# EAGLE board Jumper Board Horizontal V3.1 (EAGLE 9.6.2)
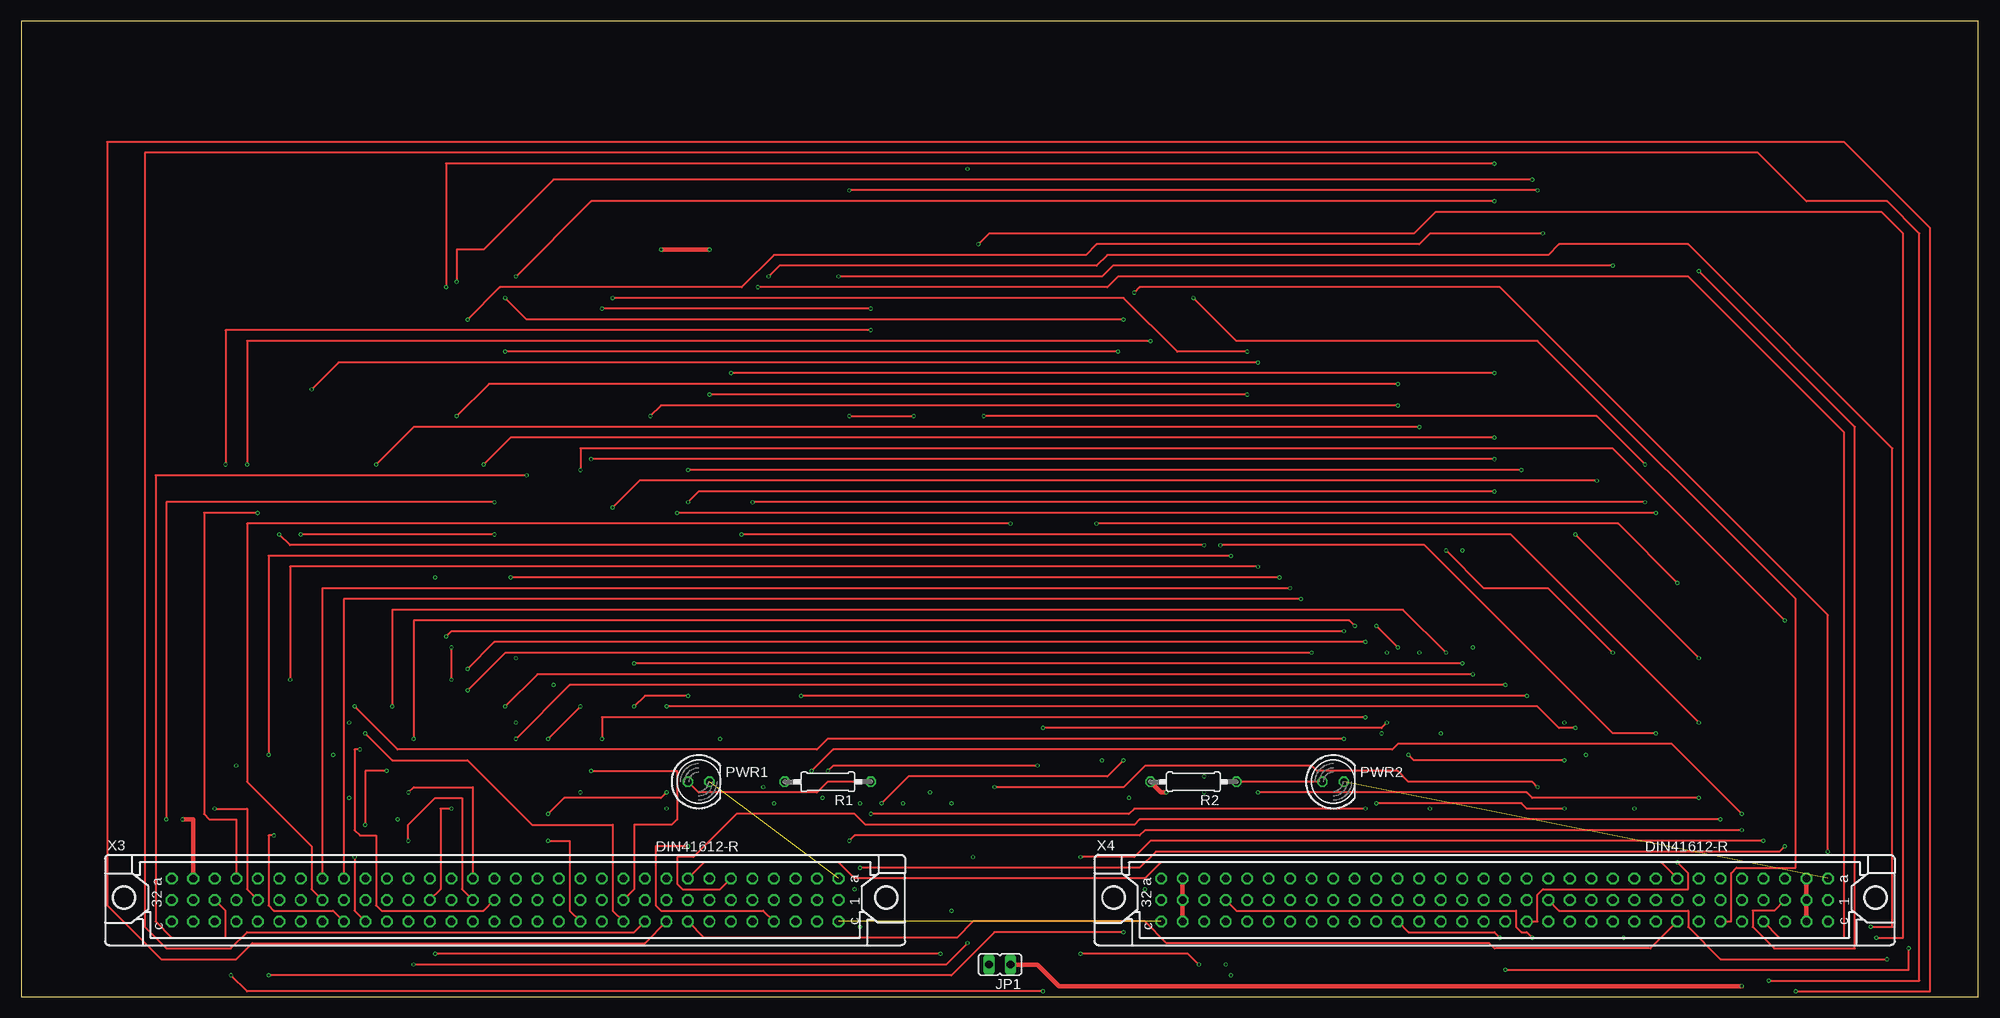
[diagram p0: board, top side]
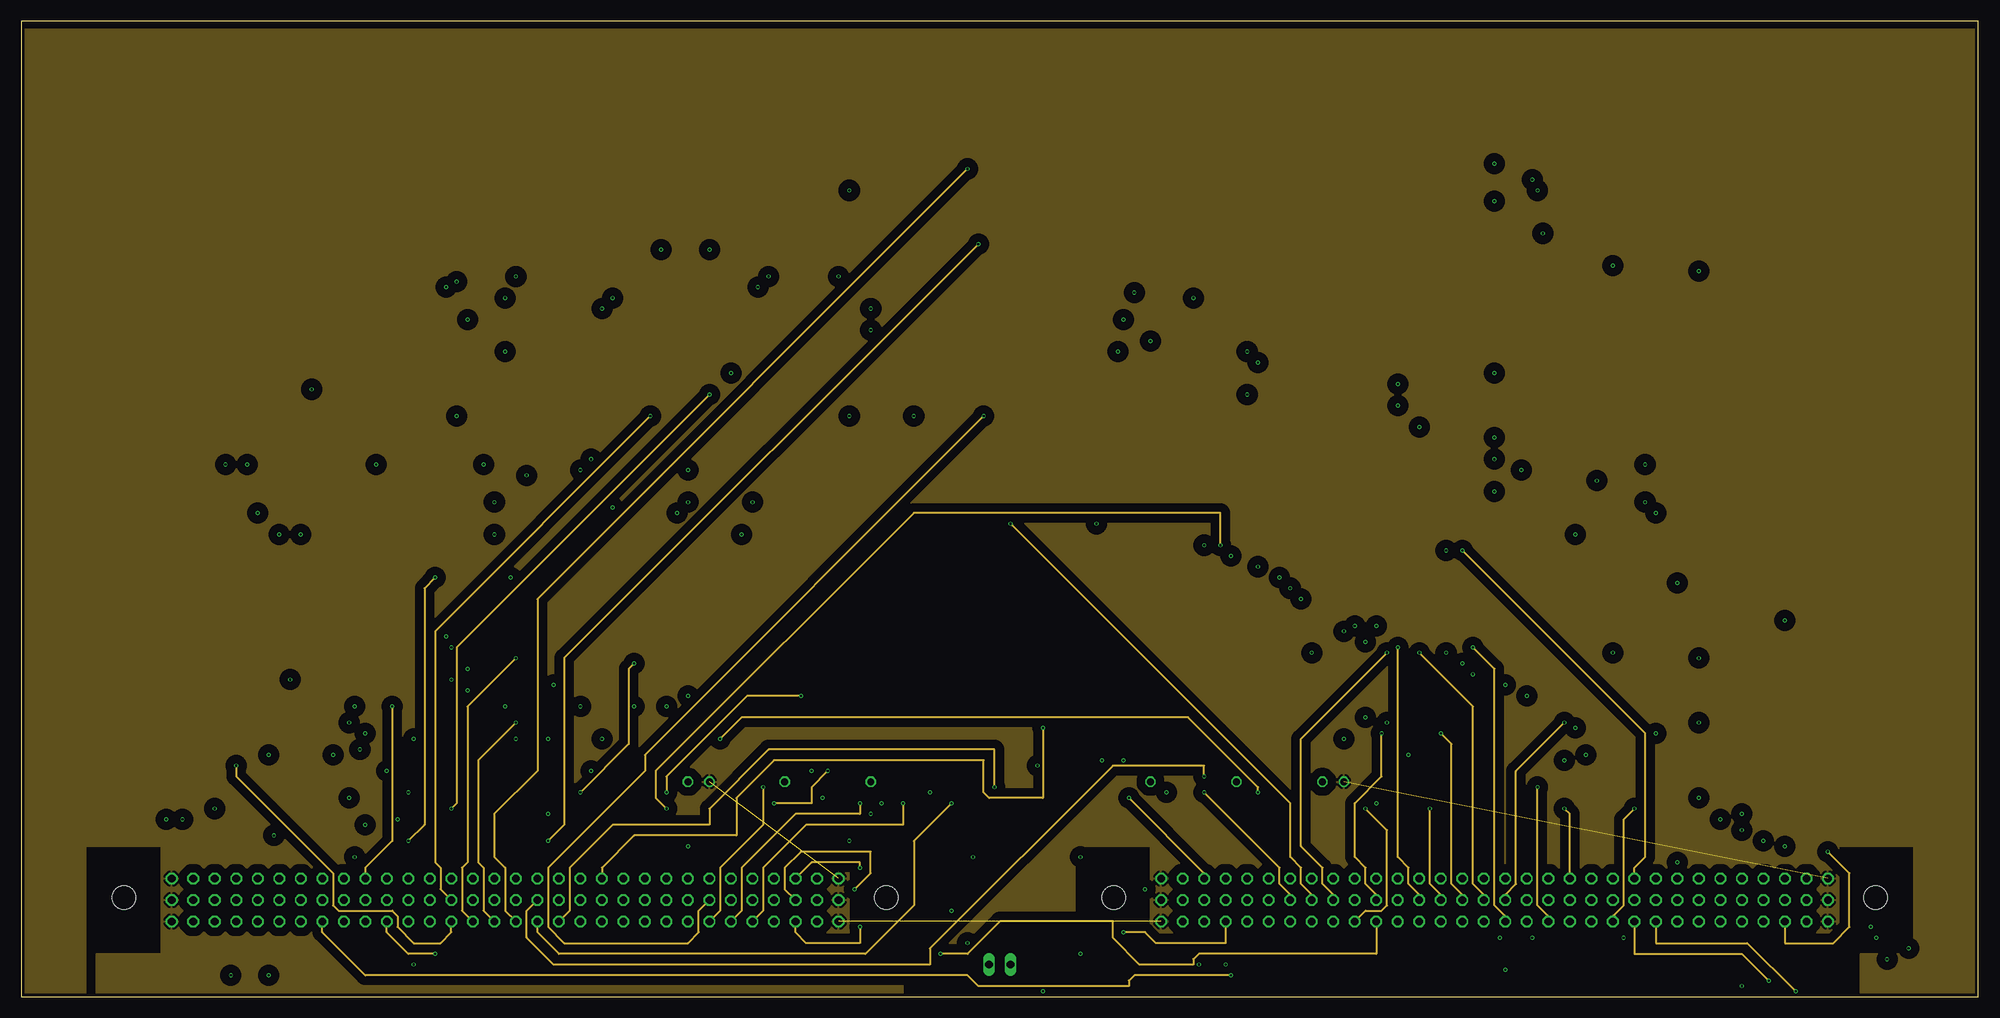
[diagram p1: board, inner layer Route2]
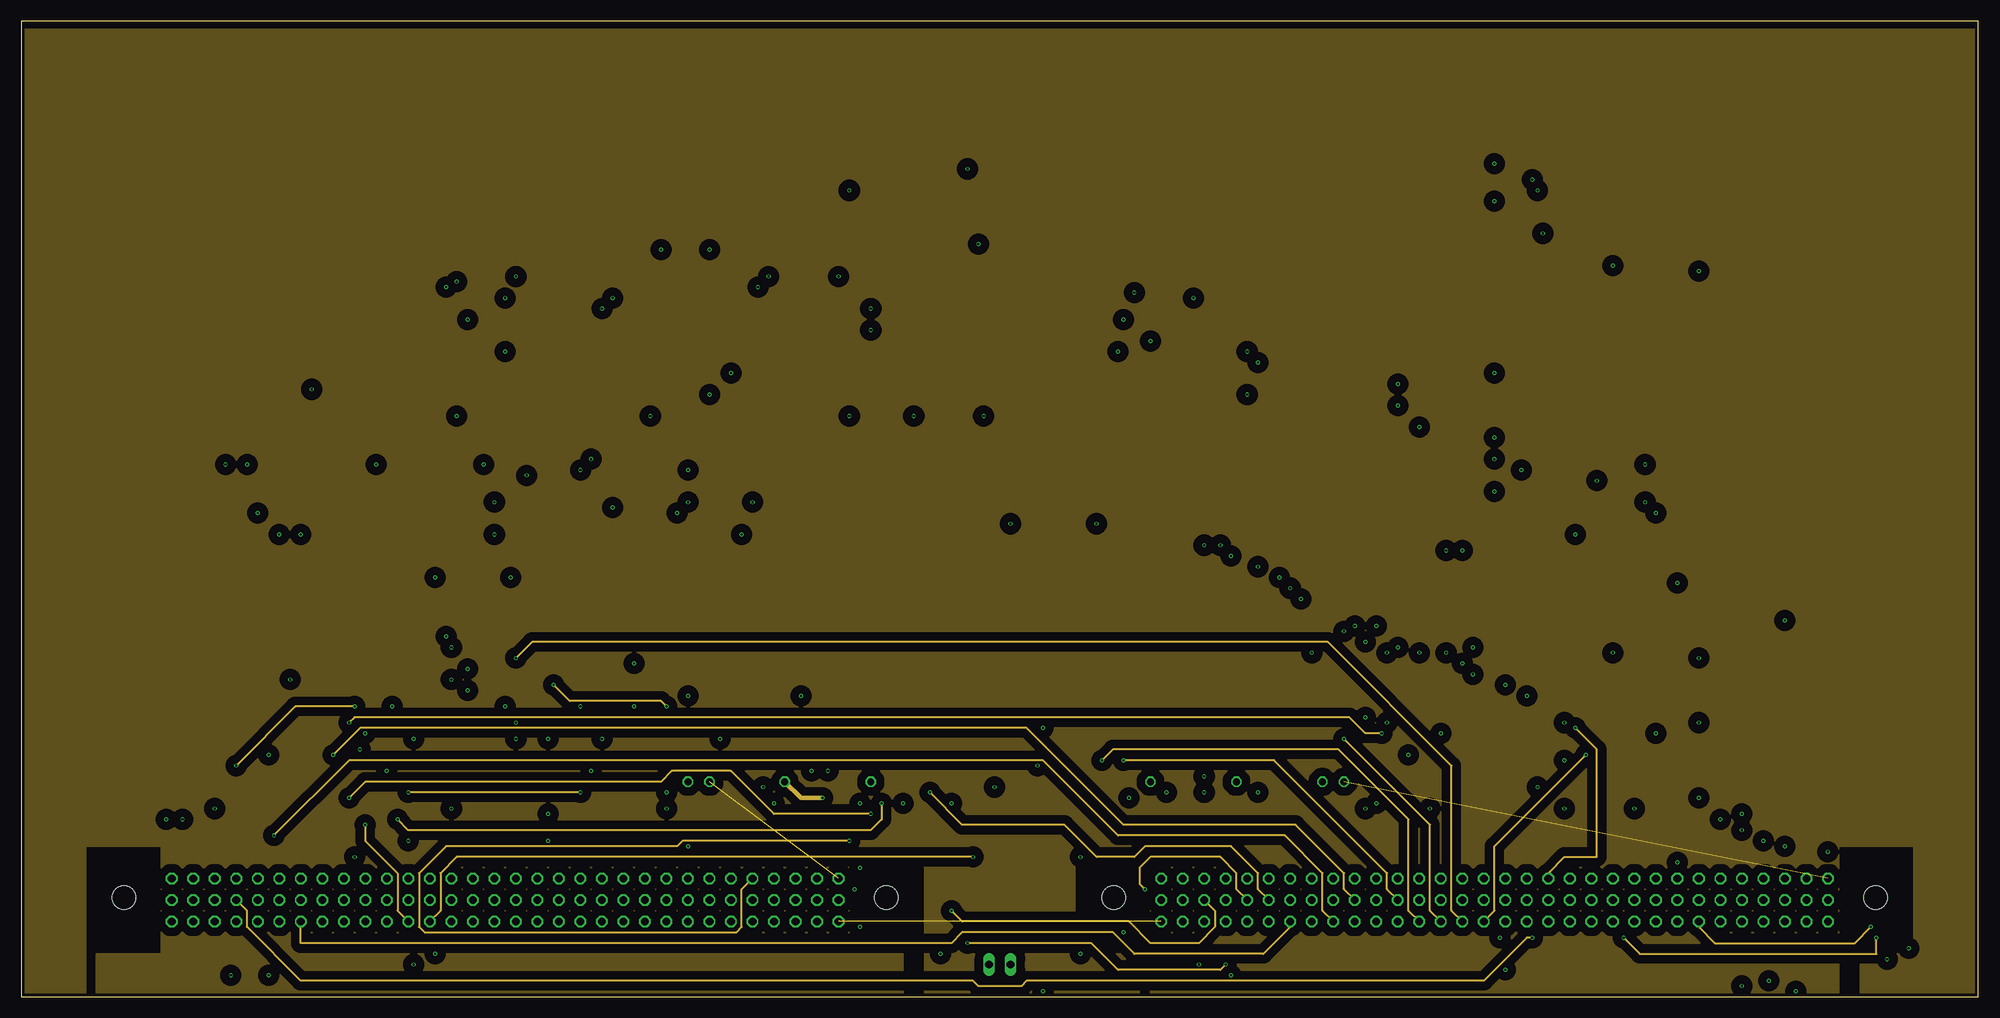
[diagram p2: board, inner layer Route15]
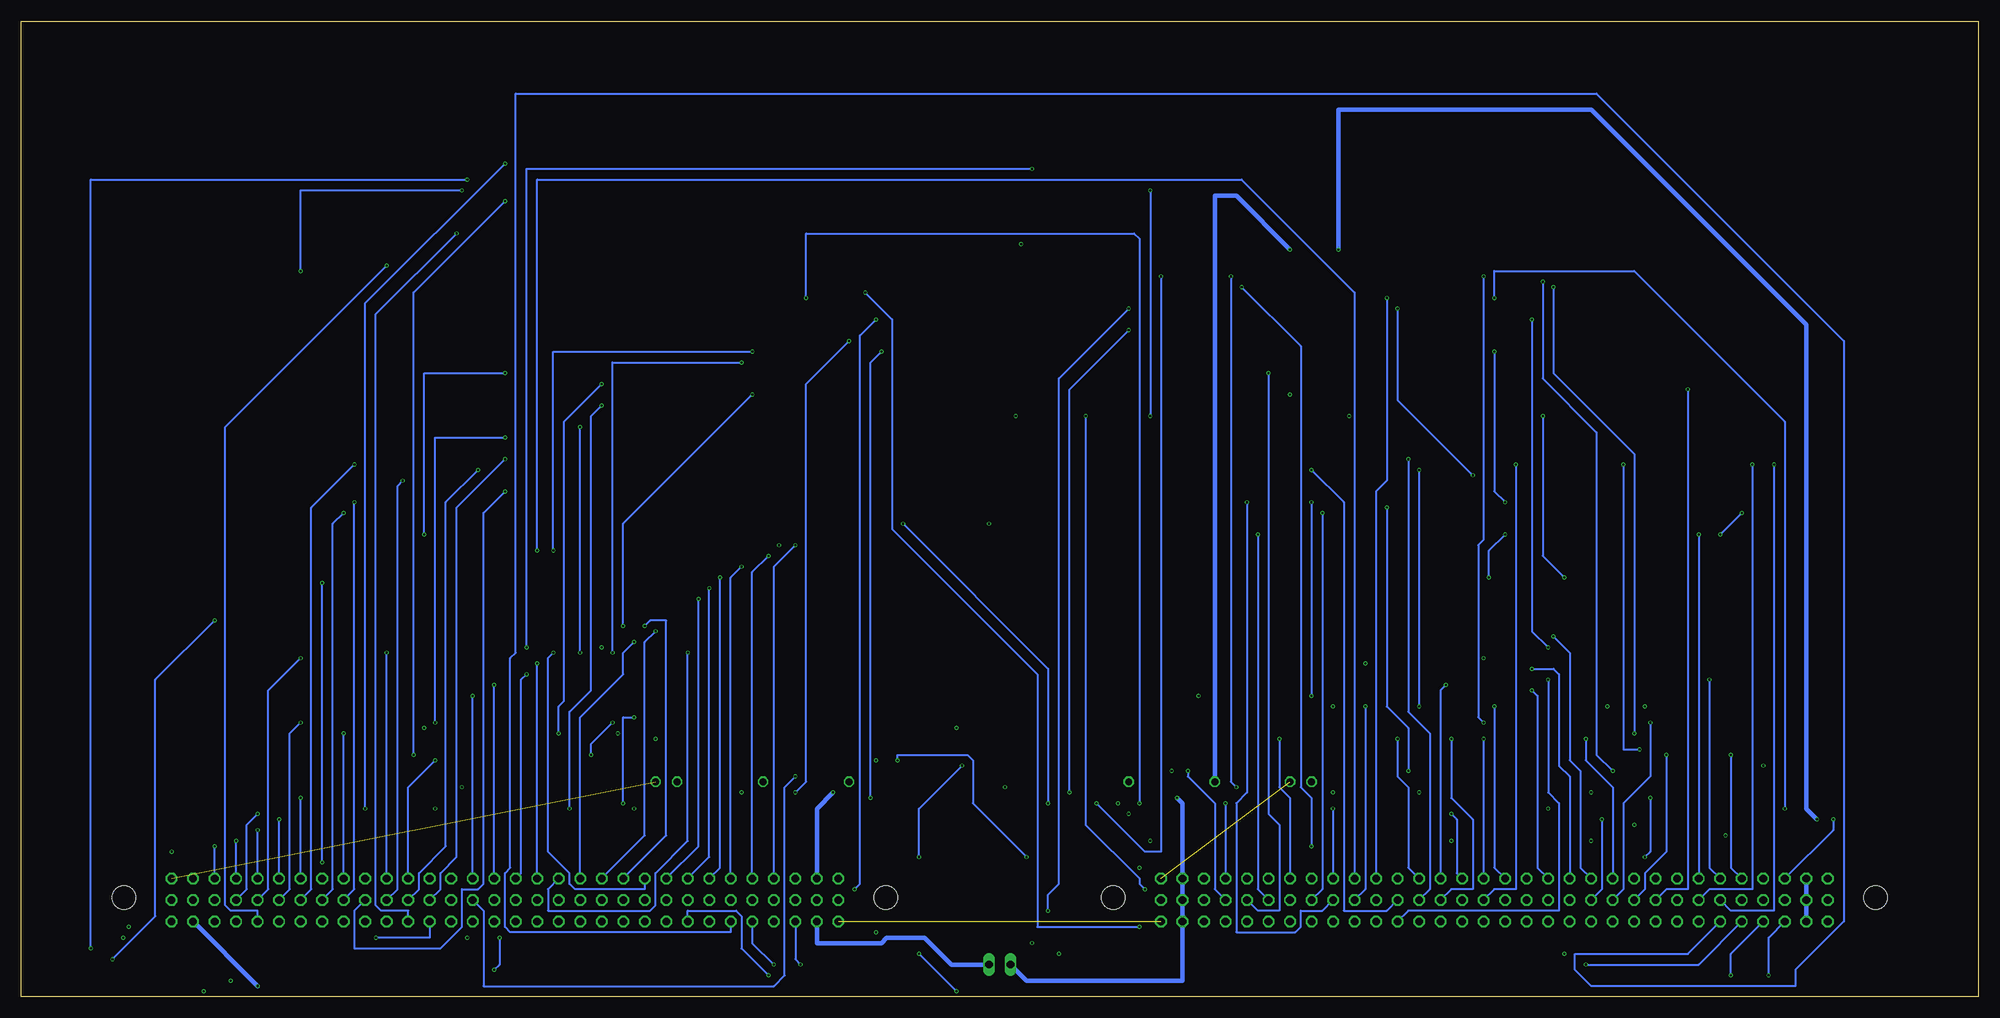
[diagram p3: board, bottom side, seen from below]

Size 231.12 x 115.24 mm. Coordinates in mm from the lower left corner, seen from the top.
Outline: 0,0 231.12,0 231.12,115.24 0,115.24 0,0
Copper layers (1*2*15*16): Top 0.035559375mm / dielectric 0.17018125mm / Route2 0.01778125mm / dielectric 47mil / Route15 0.01778125mm / dielectric 0.17018125mm / Bottom 0.035559375mm
Design rules "oshpark-4layer *": minimum track width 10mil, minimum drill 10mil, track to track 40mil, track to pad 10mil, pad to pad 10mil, via to via 10mil, smd to smd 5mil, copper to edge 15mil, drill to drill 6mil, minimum pad ring 4mil, minimum via ring 4mil, stop-mask expansion 2.5mil, vias tented up to drill 0mil, thermal gap 10mil
Net classes: 1 GND: width 0.508 mm, clearance 0.508 mm; 2 VCC1: width 0.508 mm, clearance 0.508 mm; 3 VCC2: width 0.508 mm, clearance 0.508 mm

## Footprints (pad centres in the part's own frame; a part is rotated, then mirrored left to right if it is on the bottom)
JP1 = drill 0.914 long: 1 0,-1.27; 2 0,1.27
LED5MM = drill 0.813 octagon: A -1.27,0; K 1.27,0
0207/10 = drill 0.813 octagon: 1 -5.08,0; 2 5.08,0
MABC96R = drill 0.914 octagon: A1 -2.54,39.37; A2 -2.54,36.83; A3 -2.54,34.29; A4 -2.54,31.75; A5 -2.54,29.21; A6 -2.54,26.67; A7 -2.54,24.13; A8 -2.54,21.59; A9 -2.54,19.05; A10 -2.54,16.51; A11 -2.54,13.97; A12 -2.54,11.43; A13 -2.54,8.89; A14 -2.54,6.35; A15 -2.54,3.81; A16 -2.54,1.27; A17 -2.54,-1.27; A18 -2.54,-3.81; A19 -2.54,-6.35; A20 -2.54,-8.89; A21 -2.54,-11.43; A22 -2.54,-13.97; A23 -2.54,-16.51; A24 -2.54,-19.05; A25 -2.54,-21.59; A26 -2.54,-24.13; A27 -2.54,-26.67; A28 -2.54,-29.21; A29 -2.54,-31.75; A30 -2.54,-34.29; A31 -2.54,-36.83; A32 -2.54,-39.37; B1 0,39.37; B2 0,36.83; B3 0,34.29; B4 0,31.75; B5 0,29.21; B6 0,26.67; B7 0,24.13; B8 0,21.59; B9 0,19.05; B10 0,16.51; B11 0,13.97; B12 0,11.43; B13 0,8.89; B14 0,6.35; B15 0,3.81; B16 0,1.27; B17 0,-1.27; B18 0,-3.81; B19 0,-6.35; B20 0,-8.89; B21 0,-11.43; B22 0,-13.97; B23 0,-16.51; B24 0,-19.05; B25 0,-21.59; B26 0,-24.13; B27 0,-26.67; B28 0,-29.21; B29 0,-31.75; B30 0,-34.29; B31 0,-36.83; B32 0,-39.37; C1 2.54,39.37; C2 2.54,36.83; C3 2.54,34.29; C4 2.54,31.75; C5 2.54,29.21; C6 2.54,26.67; C7 2.54,24.13; C8 2.54,21.59; C9 2.54,19.05; C10 2.54,16.51; C11 2.54,13.97; C12 2.54,11.43; C13 2.54,8.89; C14 2.54,6.35; C15 2.54,3.81; C16 2.54,1.27; C17 2.54,-1.27; C18 2.54,-3.81; C19 2.54,-6.35; C20 2.54,-8.89; C21 2.54,-11.43; C22 2.54,-13.97; C23 2.54,-16.51; C24 2.54,-19.05; C25 2.54,-21.59; C26 2.54,-24.13; C27 2.54,-26.67; C28 2.54,-29.21; C29 2.54,-31.75; C30 2.54,-34.29; C31 2.54,-36.83; C32 2.54,-39.37 | hole 2.794: -0.305,45; -0.305,-45

## Placement (x,y rotation side)
JP1  [JP1]  115.57,3.81 90 top
PWR1  [LED5MM]  80.01,25.4 0 top
PWR2  [LED5MM]  154.94,25.4 0 top
R1  330  [0207/10]  95.25,25.4 180 top
R2  330  [0207/10]  138.43,25.4 180 top
X3  MABC96R  [MABC96R]  57.15,11.43 270 top
X4  MABC96R  [MABC96R]  173.99,11.43 270 top

## Library data of the parts
JP1 = jumper
PWR1 PWR2 = led
R1 R2 = eagle-ltspice; SPICEMODEL: NONE; SPICEPREFIX: R
X3 X4 = con-vg

## Nets
GND [GND]: PWR1.K PWR2.K X3.A1 X3.A32 X3.B1 X3.B32 X3.C1 X3.C32 X4.A1 X4.A32 X4.B1 X4.B32 X4.C1 X4.C32
N$4: X3.A3 X4.A3
N$6: X3.A4 X4.A4
N$7: X3.A5 X4.A5
N$8: X3.A6 X4.A6
N$9: X3.A7 X4.A7
N$10: X3.A8 X4.A8
N$11: X3.A9 X4.A9
N$12: X3.A10 X4.A10
N$13: X3.A11 X4.A11
N$14: X3.A12 X4.A12
N$15: X3.A13 X4.A13
N$16: X3.A14 X4.A14
N$17: X3.A15 X4.A15
N$18: X3.A16 X4.A16
N$19: X3.A17 X4.A17
N$20: X3.A18 X4.A18
N$21: X3.A19 X4.A19
N$22: X3.A20 X4.A20
N$23: X3.A21 X4.A21
N$24: X3.A22 X4.A22
N$25: X3.A23 X4.A23
N$26: X3.A24 X4.A24
N$27: X3.A25 X4.A25
N$28: X3.A26 X4.A26
N$29: X3.A27 X4.A27
N$30: X3.A28 X4.A28
N$31: X3.A29 X4.A29
N$32: X3.A30 X4.A30
N$35: PWR1.A R1.1
N$36: PWR2.A R2.1
N$37: X3.B3 X4.B3
N$38: X3.B4 X4.B4
N$39: X3.B5 X4.B5
N$40: X3.B6 X4.B6
N$41: X3.B7 X4.B7
N$42: X3.B8 X4.B8
N$43: X3.B9 X4.B9
N$44: X3.B10 X4.B10
N$45: X3.B11 X4.B11
N$46: X3.B12 X4.B12
N$47: X3.B13 X4.B13
N$48: X3.B14 X4.B14
N$49: X3.B15 X4.B15
N$50: X3.B16 X4.B16
N$51: X3.B17 X4.B17
N$52: X3.B18 X4.B18
N$53: X3.B19 X4.B19
N$54: X3.B20 X4.B20
N$55: X3.B21 X4.B21
N$56: X3.B22 X4.B22
N$57: X3.B23 X4.B23
N$58: X3.B24 X4.B24
N$59: X3.B25 X4.B25
N$60: X3.B26 X4.B26
N$61: X3.B27 X4.B27
N$62: X3.B28 X4.B28
N$63: X3.B29 X4.B29
N$64: X3.B30 X4.B30
N$69: X3.C3 X4.C3
N$70: X3.C4 X4.C4
N$71: X3.C5 X4.C5
N$72: X3.C6 X4.C6
N$73: X3.C7 X4.C7
N$74: X3.C8 X4.C8
N$75: X3.C9 X4.C9
N$76: X3.C10 X4.C10
N$77: X3.C11 X4.C11
N$78: X3.C12 X4.C12
N$79: X3.C13 X4.C13
N$80: X3.C14 X4.C14
N$81: X3.C15 X4.C15
N$82: X3.C16 X4.C16
N$83: X3.C17 X4.C17
N$84: X3.C18 X4.C18
N$85: X3.C19 X4.C19
N$86: X3.C20 X4.C20
N$87: X3.C21 X4.C21
N$88: X3.C22 X4.C22
N$89: X3.C23 X4.C23
N$90: X3.C24 X4.C24
N$91: X3.C25 X4.C25
N$92: X3.C26 X4.C26
N$93: X3.C27 X4.C27
N$94: X3.C28 X4.C28
N$95: X3.C29 X4.C29
N$96: X3.C30 X4.C30
V1 [VCC2]: JP1.2 R1.2 X3.A2 X3.A31 X3.B2 X3.B31 X3.C2 X3.C31
V2 [VCC1]: JP1.1 R2.2 X4.A2 X4.A31 X4.B2 X4.B31 X4.C2 X4.C31

## Tracks (layer width: path | path; a pad name or v marks a point on that pad's centre or on a via)
GND  (3 unrouted)
  pour Route2: 104.14,0 8.89,0 8.89,5.08 16.51,5.08 16.51,17.78 7.62,17.78 7.62,0 0,0 0,114.3 231.14,114.3 231.14,0 217.17,0 217.17,5.08 223.52,5.08 223.52,17.78 214.63,17.78 214.63,0 133.35,0 133.35,17.78 124.46,17.78 124.46,5.08 132.08,5.08 132.08,0 106.68,0 106.68,17.78 97.79,17.78 97.79,5.08 104.14,5.08
N$4  (via drill 0.25)
  Top 0.254: v99.06,15.24 132.08,15.24 133.99,17.14 207.65,17.14 v208.28,17.78
  Route2 0.254: X3.A3 93.34,15.88 99.06,15.88 v99.06,15.24
  Bottom 0.254: X4.A3 v208.28,17.78
N$6  (via drill 0.25)
  Top 0.254: v95.25,26.67 95.89,27.3 v120.02,27.3 | v125.09,16.51 131.44,16.51 133.35,18.41 v205.74,18.41
  Route2 0.254: v88.9,22.86 93.34,22.86 93.34,24.77 v95.25,26.67
  Bottom 0.254: v88.9,22.86 X3.A4 | v120.02,27.3 125.09,22.23 v125.09,16.51 | X4.A4 v205.74,18.41
N$7  (via drill 0.25)
  Top 0.254: v97.79,18.41 98.42,19.05 132.08,19.05 132.72,19.68 v203.2,19.68
  Route15 0.254: X3.A5 85.09,12.7 85.09,8.26 84.45,7.62 47.62,7.62 46.99,8.26 46.99,14.61 50.16,17.78 77.47,17.78 78.11,18.41 v97.79,18.41
  Bottom 0.254: X4.A5 v203.2,19.68
N$8  (via drill 0.25)
  Top 0.254: X3.A6 82.55,12.7 78.11,12.7 77.47,13.34 77.47,16.51 79.38,16.51 84.45,21.59 98.42,21.59 99.69,20.32 131.44,20.32 132.08,20.95 v200.66,20.95
  Bottom 0.254: X4.A6 v200.66,20.95
N$9  (via drill 0.25)
  Top 0.254: v146.05,24.13 177.8,24.13 178.44,23.5 v198.12,23.5
  Route2 0.254: v82.55,30.48 85.09,33.02 137.79,33.02 146.05,24.77 v146.05,24.13
  Bottom 0.254: X3.A7 81.28,23.5 82.55,24.77 v82.55,30.48 | X4.A7 v198.12,23.5
N$10
  Top 0.254: X3.A8 80.64,15.88 96.52,15.88 98.42,13.97 132.72,13.97 134.62,15.88 193.68,15.88 X4.A8
N$11  (via drill 0.25)
  Top 0.254: v141.6,53.34 165.74,53.34 187.96,31.11 v193.04,31.11
  Route2 0.254: v76.2,22.23 74.93,23.5 74.93,26.67 105.41,57.15 141.6,57.15 v141.6,53.34
  Bottom 0.254: v76.2,22.23 X3.A9 | X4.A9 v193.04,31.11
N$12  (via drill 0.25)
  Route2 0.254: v170.18,52.7 191.77,31.11 191.77,16.51 190.5,15.24 X4.A10
  Bottom 0.254: X3.A10 73.66,83.19 87,96.52 170.18,96.52 v170.18,52.7
N$13  (via drill 0.25)
  Top 0.254: v69.85,82.55 130.18,82.55 136.53,76.2 v144.78,76.2 | v168.28,52.7 172.72,48.26 180.34,48.26 v187.96,40.64
  Bottom 0.254: X3.A11 71.12,59.69 69.85,60.96 v69.85,82.55 | v144.78,76.2 168.28,76.2 v168.28,52.7 | X4.A11 v187.96,40.64
N$14  (via drill 0.25)
  Top 0.254: v120.65,31.75 160.66,31.75 v161.29,32.38 | v163.83,28.57 164.47,27.94 v182.25,27.94
  Route2 0.254: X3.A12 68.58,15.24 72.39,19.05 84.45,19.05 84.45,23.5 88.9,27.94 113.67,27.94 113.67,24.13 114.3,23.5 120.65,23.5 v120.65,31.75
  Bottom 0.254: v161.29,32.38 163.83,29.84 v163.83,28.57 | v182.25,27.94 185.42,24.77 X4.A12
N$15  (via drill 0.25)
  Top 0.254: v68.58,30.48 68.58,33.02 v158.75,33.02 | v160.02,22.86 177.16,22.86 177.8,22.23 v182.25,22.23
  Route2 0.254: v182.25,22.23 182.88,21.59 X4.A13
  Bottom 0.254: X3.A13 67.31,15.24 67.31,24.77 68.58,26.04 v68.58,30.48 | v158.75,33.02 160.02,33.02 v160.02,22.86
N$16  (via drill 0.25)
  Top 0.254: v76.2,34.29 179.07,34.29 181.61,31.75 v183.51,31.75
  Route15 0.254: v62.87,36.83 64.77,34.92 75.56,34.92 v76.2,34.29 | v183.51,31.75 186.06,29.21 186.06,16.51 182.25,16.51 180.34,14.61 X4.A14
  Bottom 0.254: X3.A14 63.5,36.2 v62.87,36.83
N$17  (via drill 0.25)
  Top 0.254: v62.23,21.59 64.14,23.5 75.56,23.5 v76.2,24.13 | v177.8,35.56 v92.08,35.56
  Route2 0.254: v76.2,24.13 76.2,26.04 85.72,35.56 v92.08,35.56
  Bottom 0.254: X3.A15 61.59,14.61 61.59,20.95 v62.23,21.59 | X4.A15 v177.8,35.56
N$18  (via drill 0.25)
  Top 0.254: v58.42,30.48 64.77,36.83 v175.26,36.83
  Bottom 0.254: v58.42,30.48 X3.A16 | X4.A16 v175.26,36.83
N$19  (via drill 0.25)
  Top 0.254: v57.15,34.29 60.96,38.1 v171.45,38.1
  Bottom 0.254: X3.A17 57.15,15.24 v57.15,34.29 | v171.45,38.1 172.09,37.47 172.09,14.61 X4.A17
N$20  (via drill 0.25)
  Top 0.254: X3.A18 53.34,24.77 46.35,24.77 v45.72,24.13 | v170.18,39.37 v72.39,39.37
  Route2 0.254: v66.04,24.13 71.75,29.84 71.75,38.73 v72.39,39.37
  Route15 0.254: v66.04,24.13 v45.72,24.13
  Bottom 0.254: X4.A18 v170.18,39.37
N$21  (via drill 0.25)
  Top 0.254: v52.7,36.2 57.15,40.64 v152.4,40.64
  Bottom 0.254: X3.A19 52.07,15.24 52.07,35.56 v52.7,36.2 | v152.4,40.64 152.4,18.41 156.21,14.61 156.21,10.79 156.84,10.16 168.91,10.16 168.91,12.7 X4.A19
N$22  (via drill 0.25)
  Top 0.254: v52.7,38.73 55.88,41.91 v158.75,41.91
  Bottom 0.254: X3.A20 48.26,26.04 49.53,27.3 49.53,38.1 50.16,38.73 v52.7,38.73 | v158.75,41.91 160.02,40.64 160.02,38.1 165.1,33.02 X4.A20
N$23  (via drill 0.25)
  Top 0.254: v50.16,42.55 50.8,43.18 v156.21,43.18
  Bottom 0.254: X3.A21 46.99,15.24 46.99,26.67 48.26,27.94 48.26,40.64 v50.16,42.55 | v156.21,43.18 157.48,41.91 157.48,19.05 X4.A21
N$24  (via drill 0.25)
  Top 0.254: v46.35,30.48 46.35,44.45 156.84,44.45 v157.48,43.81
  Bottom 0.254: X3.A22 43.18,24.77 46.35,27.94 v46.35,30.48 | v157.48,43.81 156.84,44.45 154.94,44.45 154.94,19.05 X4.A22
N$25  (via drill 0.25)
  Top 0.254: v43.81,34.29 43.81,45.72 163.19,45.72 v168.28,40.64
  Route2 0.254: X3.A23 40.64,15.24 43.81,18.41 v43.81,34.29
  Bottom 0.254: v168.28,40.64 168.91,40.01 168.91,17.14 166.37,14.61 166.37,13.34 165.74,12.7 157.48,12.7 X4.A23
N$26  (via drill 0.25)
  Top 0.254: X3.A24 38.1,46.99 v151.13,46.99
  Bottom 0.254: v151.13,46.99 151.13,17.78 X4.A24
N$27  (via drill 0.25)
  Top 0.254: X3.A25 35.56,48.26 v149.86,48.26
  Bottom 0.254: v149.86,48.26 149.86,16.51 X4.A25
N$28  (via drill 0.25)
  Top 0.254: v55.88,54.61 v33.02,54.61 | v148.59,49.53 v57.78,49.53
  Bottom 0.254: v33.02,54.61 X3.A26 | v55.88,54.61 57.78,52.7 v57.78,49.53 | v148.59,49.53 148.59,15.24 X4.A26
N$29  (via drill 0.25)
  Top 0.254: v31.75,37.47 31.75,50.8 v146.05,50.8
  Bottom 0.254: X3.A27 31.75,15.24 v31.75,37.47 | v146.05,50.8 147.32,49.53 X4.A27
N$30  (via drill 0.25)
  Top 0.254: v29.21,28.57 29.21,52.07 v142.88,52.07
  Bottom 0.254: X3.A28 29.21,15.24 v29.21,28.57 | v142.88,52.07 144.78,50.16 X4.A28
N$31  (via drill 0.25)
  Top 0.254: X3.A29 25.4,20.95 22.23,20.95 21.59,21.59 21.59,57.15 v27.94,57.15 | v30.48,54.61 31.75,53.34 v139.7,53.34
  Bottom 0.254: v30.48,54.61 v27.94,57.15 | v139.7,53.34 142.24,50.8 X4.A29
N$32  (via drill 0.25)
  Top 0.254: v17.14,20.95 17.14,58.42 v55.88,58.42 | v129.54,76.2 v57.15,76.2
  Route2 0.254: v130.81,23.5 139.7,14.61 X4.A30
  Bottom 0.254: X3.A30 17.14,19.68 v17.14,20.95 | v55.88,58.42 57.15,59.69 v57.15,76.2 | v129.54,76.2 130.81,74.93 v130.81,23.5
N$35
  Top 0.254: PWR1.A 80.01,24.13 93.98,24.13 95.25,25.4 R1.1
N$36
  Top 0.254: PWR2.A R2.1
N$37  (via drill 0.25)
  Top 0.254: v97.79,68.58 v105.41,68.58 | v179.07,95.25 v97.79,95.25 | v198.12,85.72 216.53,67.31 216.53,5.71 207.01,5.71 204.47,8.26 204.47,10.16 207.01,10.16 X4.B3
  Route2 0.254: X3.B3 90.17,12.7 90.17,15.24 92.08,17.14 100.33,17.14 100.33,14.61 v98.42,12.7
  Bottom 0.254: v98.42,12.7 99.06,13.34 99.06,13.97 105.41,20.32 v105.41,68.58 | v97.79,95.25 v97.79,68.58 | v179.07,95.25 198.12,95.25 v198.12,85.72
N$38  (via drill 0.25)
  Top 0.254: v93.34,26.67 95.89,29.21 161.93,29.21 162.56,29.84 194.94,29.84 v203.2,21.59
  Bottom 0.254: X3.B4 90.17,12.7 90.17,22.86 93.34,26.04 v93.34,26.67 | v203.2,21.59 204.47,20.32 204.47,12.7 X4.B4
N$39  (via drill 0.25)
  Top 0.254: v173.99,73.66 v83.82,73.66 | v198.12,40.01 v183.51,54.61
  Bottom 0.254: X3.B5 85.09,10.16 82.55,10.16 82.55,20.32 83.82,21.59 v83.82,73.66 | v173.99,73.66 183.51,73.66 v183.51,54.61 | v198.12,40.01 201.93,36.2 201.93,12.7 X4.B5
N$40  (via drill 0.25)
  Top 0.254: v85.09,54.61 175.9,54.61 v198.12,32.38
  Bottom 0.254: X3.B6 85.09,12.7 v85.09,54.61 | v198.12,32.38 199.39,31.11 199.39,12.7 X4.B6
N$41  (via drill 0.25)
  Top 0.254: v113.67,68.58 186.06,68.58 v191.77,62.87
  Route2 0.254: X3.B7 80.01,10.16 80.01,7.62 78.74,6.35 64.14,6.35 62.23,8.26 62.23,15.24 73.66,26.67 73.66,28.57 v113.67,68.58
  Bottom 0.254: v191.77,62.87 196.85,57.78 196.85,12.7 X4.B7
N$42  (via drill 0.25)
  Top 0.254: v193.04,57.15 v77.47,57.15
  Bottom 0.254: X3.B8 77.47,12.7 v77.47,57.15 | v193.04,57.15 194.31,55.88 194.31,12.7 X4.B8
N$43  (via drill 0.25)
  Top 0.254: v191.77,58.42 v86.36,58.42
  Bottom 0.254: X3.B9 77.47,10.16 80.01,10.16 80.01,8.26 80.64,7.62 87.63,7.62 87.63,22.86 86.36,24.13 v86.36,58.42 | v191.77,58.42 191.77,12.7 X4.B9
N$44  (via drill 0.25)
  Top 0.254: v72.39,34.29 73.66,35.56 v78.74,35.56 | v78.74,58.42 80.01,59.69 v173.99,59.69
  Bottom 0.254: X3.B10 72.39,12.7 v72.39,34.29 | v78.74,58.42 v78.74,35.56 | v173.99,59.69 176.53,57.15 176.53,13.34 177.16,12.7 179.07,12.7 179.07,8.26 181.61,5.71 191.77,5.71 191.77,10.16 X4.B10
N$45  (via drill 0.25)
  Top 0.254: X3.B11 72.39,12.7 72.39,20.32 76.83,20.32 77.47,20.95 77.47,26.67 v67.31,26.67 | v69.85,57.78 73.03,60.96 v186.06,60.96
  Bottom 0.254: v67.31,26.67 67.31,31.75 69.85,34.29 v69.85,57.78 | v186.06,60.96 186.69,60.33 186.69,12.7 X4.B11
N$46  (via drill 0.25)
  Top 0.254: v177.16,62.23 v78.74,62.23
  Bottom 0.254: X3.B12 69.85,10.16 74.93,10.16 74.93,58.42 v78.74,62.23 | v177.16,62.23 180.97,58.42 180.97,17.78 184.15,14.61 184.15,12.7 X4.B12
N$47  (via drill 0.25)
  Top 0.254: v173.99,63.5 v67.31,63.5
  Bottom 0.254: X3.B13 64.77,12.7 64.77,31.11 67.31,33.66 v67.31,63.5 | v173.99,63.5 179.71,57.78 179.71,16.51 181.61,14.61 181.61,12.7 X4.B13
N$48  (via drill 0.25)
  Top 0.254: v66.04,34.29 v62.23,30.48 | v66.04,62.23 66.04,64.77 187.96,64.77 v208.28,44.45 | v220.34,4.45 200.66,4.45 196.85,8.26 196.85,10.16 181.61,10.16 X4.B14
  Bottom 0.254: X3.B14 62.23,12.7 59.69,12.7 59.69,20.95 62.23,23.5 v62.23,30.48 | v66.04,62.23 v66.04,34.29 | v208.28,44.45 215.26,37.47 215.26,9.53 v220.34,4.45
N$49  (via drill 0.25)
  Route2 0.254: X3.B15 59.69,10.16 59.69,6.99 62.87,3.81 107.31,3.81 107.31,5.71 128.91,27.3 139.7,27.3 v139.7,26.04
  Bottom 0.254: v139.7,26.04 140.97,24.77 140.97,2.54 142.24,1.27 176.53,1.27 176.53,10.16 X4.B15
N$50  (via drill 0.25)
  Top 0.254: v54.61,62.87 57.78,66.04 v173.99,66.04
  Route2 0.254: v182.25,32.38 176.53,26.67 176.53,13.34 175.26,12.06 X4.B16
  Bottom 0.254: X3.B16 57.15,12.7 54.61,12.7 v54.61,62.87 | v173.99,66.04 182.25,66.04 v182.25,32.38
N$51  (via drill 0.25)
  Top 0.254: X3.B17 54.61,10.16 42.55,10.16 41.91,10.79 41.91,19.05 40.01,19.05 39.37,19.68 39.37,29.21 v40.01,29.21 | v41.91,62.87 46.35,67.31 v165.1,67.31
  Route2 0.254: v165.1,40.64 171.45,34.29 171.45,13.34 172.72,12.06 X4.B17
  Bottom 0.254: v40.01,29.21 41.91,29.21 v41.91,62.87 | v165.1,40.64 v165.1,67.31
N$52  (via drill 0.25)
  Top 0.254: X3.B18 52.07,12.7 52.07,23.5 48.9,23.5 45.72,20.32 v45.72,18.41 | v51.44,68.58 55.24,72.39 v162.56,72.39
  Route2 0.254: v45.72,18.41 47.62,20.32 47.62,48.26 v48.9,49.53 | v167.64,31.11 168.91,29.84 168.91,13.34 170.18,12.06 X4.B18
  Bottom 0.254: v48.9,49.53 51.44,52.07 v51.44,68.58 | v162.56,72.39 167,67.94 167,34.92 167.64,34.29 v167.64,31.11
N$53  (via drill 0.25)
  Top 0.254: v74.3,68.58 75.56,69.85 v162.56,69.85
  Route2 0.254: X3.B19 49.53,12.7 49.53,15.24 48.9,15.88 48.9,43.18 v74.3,68.58 | v166.37,22.23 166.37,13.34 167.64,12.06 X4.B19
  Bottom 0.254: v162.56,69.85 163.83,68.58 163.83,36.2 166.37,33.66 v166.37,22.23
N$54  (via drill 0.25)
  Top 0.254: X3.B20 49.53,12.7 49.53,22.23 v50.8,22.23 | v144.78,71.12 v81.28,71.12 | v162.56,41.27 v160.02,43.81
  Route2 0.254: v50.8,22.23 51.44,22.86 51.44,41.27 v81.28,71.12 | v162.56,41.27 162.56,16.51 163.83,15.24 163.83,13.34 165.1,12.06 X4.B20
  Bottom 0.254: v144.78,71.12 160.02,55.88 v160.02,43.81
N$55  (via drill 0.25)
  Top 0.254: v101.6,22.86 104.78,26.04 128.27,26.04 v130.18,27.94
  Route15 0.254: v44.45,20.95 45.72,19.68 100.33,19.68 101.6,20.95 v101.6,22.86 | v130.18,27.94 147.96,27.94 161.29,14.61 161.29,12.7 X4.B21
  Bottom 0.254: X3.B21 44.45,12.7 v44.45,20.95
N$56  (via drill 0.25)
  Route2 0.254: v160.66,31.11 160.66,26.04 157.48,22.86 157.48,16.51 158.75,15.24 158.75,13.34 160.02,12.06 X4.B22
  Route15 0.254: v38.73,32.38 39.37,33.02 156.84,33.02 158.75,31.11 v160.66,31.11
  Bottom 0.254: X3.B22 41.91,12.7 41.91,22.86 38.73,26.04 v38.73,32.38
N$57  (via drill 0.25)
  Route15 0.254: v36.83,28.57 40.01,31.75 118.75,31.75 130.18,20.32 150.5,20.32 156.21,14.61 156.21,12.7 X4.B23
  Bottom 0.254: X3.B23 39.37,12.7 39.37,14.61 36.83,17.14 v36.83,28.57
N$58  (via drill 0.25)
  Top 0.254: v34.29,71.75 37.47,74.93 v146.05,74.93
  Route2 0.254: v161.29,40.64 151.13,30.48 151.13,17.78 153.67,15.24 153.67,13.34 154.94,12.06 X4.B24
  Bottom 0.254: X3.B24 36.83,12.7 34.29,12.7 v34.29,71.75 | v146.05,74.93 161.29,74.93 v161.29,40.64
N$59  (via drill 0.25)
  Top 0.254: X3.B25 34.29,12.7 34.29,17.78 26.67,25.4 26.67,55.88 v116.84,55.88
  Route2 0.254: v116.84,55.88 149.86,22.86 149.86,16.51 151.13,15.24 151.13,13.34 152.4,12.06 X4.B25
N$60  (via drill 0.25)
  Top 0.254: v26.67,62.87 26.67,77.47 v133.35,77.47
  Route2 0.254: v139.7,24.13 148.59,15.24 148.59,13.34 149.86,12.06 X4.B26
  Bottom 0.254: X3.B26 31.75,12.7 26.67,12.7 v26.67,62.87 | v133.35,77.47 138.43,72.39 138.43,25.4 v139.7,24.13
N$61  (via drill 0.25)
  Top 0.254: v24.13,62.87 24.13,78.74 v100.33,78.74
  Route15 0.254: v107.31,24.13 111.12,20.32 123.19,20.32 127,16.51 131.44,16.51 132.72,17.78 142.88,17.78 146.05,14.61 146.05,12.7 X4.B27
  Bottom 0.254: X3.B27 29.21,10.16 24.13,10.16 v24.13,62.87 | v100.33,78.74 107.31,71.75 v107.31,24.13
N$62  (via drill 0.25)
  Top 0.254: X3.B28 26.67,12.7 26.67,22.23 v22.86,22.23 | v57.15,82.55 59.69,80.01 v130.18,80.01
  Route15 0.254: v132.72,12.7 132.08,13.34 132.08,15.24 133.35,16.51 141.6,16.51 143.51,14.61 143.51,12.7 X4.B28
  Bottom 0.254: v22.86,22.23 22.86,67.94 40.64,85.72 57.15,85.72 v57.15,82.55 | v130.18,80.01 132.08,78.11 132.08,13.34 v132.72,12.7
N$63  (via drill 0.25)
  Top 0.254: v178.44,6.99 177.8,7.62 177.16,7.62 176.53,8.26 176.53,10.16 143.51,10.16 X4.B29
  Route15 0.254: X3.B29 26.67,10.16 26.67,8.26 33.02,1.91 112.39,1.91 113.03,1.27 118.11,1.27 118.75,1.91 172.72,1.91 177.8,6.99 v178.44,6.99
N$64  (via drill 0.25)
  Top 0.254: X3.B30 24.13,10.16 24.13,6.99 17.78,6.99 15.88,8.89 15.88,61.59 v59.69,61.59 | v100.33,81.28 v68.58,81.28
  Route15 0.254: v109.86,10.16 111.12,8.89 130.81,8.89 133.35,6.35 139.06,6.35 140.97,8.26 140.97,10.16 X4.B30
  Bottom 0.254: v59.69,61.59 68.58,70.48 v68.58,81.28 | v100.33,81.28 108.58,73.03 108.58,13.34 109.86,12.06 v109.86,10.16
N$69  (via drill 0.25)
  Top 0.254: v131.44,83.19 132.08,83.82 174.62,83.82 213.36,45.09 v213.36,17.14
  Route2 0.254: X3.C3 91.44,7.62 92.71,6.35 99.06,6.35 v99.06,8.26 | v213.36,17.14 215.9,14.61 215.9,8.26 214,6.35 208.28,6.35 X4.C3
  Bottom 0.254: v99.06,8.26 111.12,8.26 111.12,38.1 128.27,55.24 128.27,80.01 v131.44,83.19
N$70  (via drill 0.25)
  Top 0.254: X3.C4 87.63,10.16 75.56,10.16 74.93,10.79 74.93,17.78 v78.74,17.78 | v87,83.82 128.27,83.82 129.54,85.09 196.85,85.09 215.26,66.67 215.26,6.99 207.65,6.99 X4.C4
  Bottom 0.254: v78.74,17.78 78.74,23.5 80.01,24.77 80.01,76.83 v87,83.82
N$71  (via drill 0.25)
  Top 0.254: v96.52,85.09 127.64,85.09 128.91,86.36 v187.96,86.36
  Route2 0.254: X3.C5 87.63,10.16 87.63,15.24 92.71,20.32 104.14,20.32 v104.14,22.86
  Bottom 0.254: v104.14,22.86 98.42,17.14 96.52,17.14 v96.52,85.09 | v187.96,86.36 207.01,67.31 207.01,10.79 206.38,10.16 203.2,10.16 X4.C5
N$72  (via drill 0.25)
  Top 0.254: v138.43,82.55 143.51,77.47 179.07,77.47 209.55,46.99 209.55,15.24 202.56,15.24 201.93,14.61 201.93,8.89 X4.C6
  Route2 0.254: X3.C6 85.09,10.16 85.09,15.24 91.44,21.59 99.06,21.59 v99.06,22.86
  Bottom 0.254: v99.06,22.86 99.06,89.53 99.69,90.17 138.43,90.17 v138.43,82.55
N$73  (via drill 0.25)
  Top 0.254: v88.27,85.09 89.53,86.36 127,86.36 128.27,87.63 180.34,87.63 181.61,88.9 196.85,88.9 220.98,64.77 220.98,8.26 v218.44,8.26
  Route2 0.254: X3.C7 82.55,10.16 82.55,15.24 87.63,20.32 v87.63,24.77
  Route15 0.254: v218.44,8.26 216.53,6.35 200.03,6.35 198.12,8.26 X4.C7
  Bottom 0.254: v87.63,24.77 88.27,25.4 v88.27,85.09
N$74
  Top 0.254: X3.C8 80.64,6.99 110.49,6.99 112.39,8.89 132.72,8.89 135.25,6.35 173.35,6.35 173.99,5.71 192.41,5.71 X4.C8
N$75  (via drill 0.25)
  Top 0.254: X3.C9 73.66,6.35 27.3,6.35 25.4,4.45 16.51,4.45 10.16,10.79 10.16,100.97 215.26,100.97 225.43,90.81 225.43,0.64 v209.55,0.64
  Route2 0.254: v209.55,0.64 203.84,6.35 193.04,6.35 X4.C9
N$76  (via drill 0.25)
  Top 0.254: X3.C10 72.39,7.62 26.67,7.62 24.77,5.71 17.14,5.71 14.61,8.26 14.61,99.69 205.1,99.69 210.82,93.98 220.34,93.98 224.16,90.17 224.16,1.91 v206.38,1.91
  Route2 0.254: v206.38,1.91 203.2,5.08 190.5,5.08 X4.C10
N$77  (via drill 0.25)
  Top 0.254: X3.C11 69.85,10.16 69.85,20.32 60.33,20.32 52.7,27.94 43.81,27.94 v40.64,31.11 | v50.16,83.82 50.16,98.42 v173.99,98.42
  Route2 0.254: v190.5,22.23 189.23,20.95 189.23,10.79 187.96,9.53 X4.C11
  Bottom 0.254: v40.64,31.11 40.64,64.14 50.16,73.66 v50.16,83.82 | v173.99,98.42 190.5,81.92 v190.5,22.23
N$78  (via drill 0.25)
  Top 0.254: v50.8,41.27 v50.8,37.47 | v52.7,80.01 56.52,83.82 85.09,83.82 88.9,87.63 125.73,87.63 127,88.9 165.1,88.9 166.37,90.17 v179.71,90.17
  Bottom 0.254: X3.C12 67.31,10.16 49.53,10.16 49.53,22.86 50.8,24.13 v50.8,37.47 | v50.8,41.27 52.7,43.18 v52.7,80.01 | v179.71,90.17 189.23,80.64 189.23,10.79 188.59,10.16 185.42,10.16 X4.C12
N$79  (via drill 0.25)
  Top 0.254: X3.C13 64.77,10.16 64.77,18.41 v62.23,18.41 | v113.03,88.9 114.3,90.17 164.47,90.17 167,92.71 219.71,92.71 222.25,90.17 222.25,6.99 v219.07,6.99
  Route2 0.254: v62.23,18.41 64.14,20.32 64.14,40.01 v113.03,88.9
  Route15 0.254: v219.07,6.99 219.07,5.08 191.13,5.08 v189.23,6.99
  Bottom 0.254: v189.23,6.99 182.88,6.99 X4.C13
N$80  (via drill 0.25)
  Top 0.254: v114.94,24.77 130.18,24.77 132.72,27.3 152.4,27.3 153.03,26.67 162.56,26.67 163.83,25.4 178.44,25.4 v179.07,24.77
  Route2 0.254: X3.C14 64.77,10.16 64.77,15.24 69.85,20.32 81.28,20.32 81.28,22.23 88.27,29.21 114.94,29.21 v114.94,24.77 | v179.07,24.77 179.07,10.79 180.34,9.53 X4.C14
N$81  (via drill 0.25)
  Top 0.254: v127,55.88 188.59,55.88 v195.58,48.9 | v195.58,15.88 196.85,14.61 196.85,12.7 179.71,12.7 179.07,12.06 179.07,8.89 X4.C15
  Route2 0.254: X3.C15 60.96,7.62 63.5,5.08 99.69,5.08 105.41,10.79 105.41,18.41 v109.86,22.86
  Bottom 0.254: v109.86,22.86 109.86,38.73 v127,55.88 | v195.58,15.88 v195.58,48.9
N$82  (via drill 0.25)
  Route2 0.254: X3.C16 57.15,10.16 57.15,15.24 55.88,16.51 55.88,21.59 60.96,26.67 60.96,46.99 v111.76,97.79 | v171.45,41.27 173.99,38.73 173.99,10.79 175.26,9.53 X4.C16
  Bottom 0.254: v111.76,97.79 171.45,97.79 v171.45,41.27
N$83  (via drill 0.25)
  Top 0.254: v58.42,85.09 67.31,93.98 v173.99,93.98
  Route2 0.254: X3.C17 54.61,10.16 54.61,15.24 53.98,15.88 53.98,27.94 v58.42,32.38
  Route15 0.254: v184.78,28.57 173.99,17.78 173.99,10.16 X4.C17
  Bottom 0.254: v58.42,32.38 59.05,33.02 59.05,53.34 58.42,53.98 v58.42,85.09 | v173.99,93.98 184.78,83.19 v184.78,28.57
N$84  (via drill 0.25)
  Route2 0.254: X3.C18 52.07,10.16 52.07,15.24 52.7,15.88 52.7,34.29 v58.42,40.01
  Route15 0.254: v58.42,40.01 60.33,41.91 154.31,41.91 168.91,27.3 168.91,10.16 X4.C18
N$85  (via drill 0.25)
  Top 0.254: v39.37,34.29 44.45,29.21 93.98,29.21 95.25,30.48 v156.21,30.48
  Route2 0.254: X3.C19 50.8,7.62 49.53,6.35 46.35,6.35 44.45,8.26 44.45,9.53 43.81,10.16 37.47,10.16 36.83,10.79 36.83,14.61 25.4,26.04 v25.4,27.3
  Route15 0.254: v25.4,27.3 32.38,34.29 v39.37,34.29 | v156.21,30.48 166.37,20.32 166.37,10.16 X4.C19
N$86  (via drill 0.25)
  Route15 0.254: X3.C20 49.53,10.16 49.53,14.61 51.44,16.51 v112.39,16.51 | v127.64,27.94 128.91,29.21 155.57,29.21 163.83,20.95 163.83,10.16 X4.C20
  Bottom 0.254: v112.39,16.51 118.75,22.86 118.75,27.94 119.38,28.57 127.64,28.57 v127.64,27.94
N$87  (via drill 0.25)
  Top 0.254: v40.64,20.32 40.64,26.67 v43.18,26.67 | v51.44,84.45 51.44,88.27 54.61,88.27 62.87,96.52 v178.44,96.52 | v222.88,5.71 222.88,3.17 v175.26,3.17 | v174.62,6.99 173.99,7.62 163.83,7.62 X4.C21
  Route15 0.254: X3.C21 44.45,10.16 44.45,14.61 40.64,18.41 v40.64,20.32
  Bottom 0.254: v43.18,26.67 45.09,28.57 45.09,66.67 51.44,73.03 v51.44,84.45 | v178.44,96.52 222.88,96.52 v222.88,5.71 | v175.26,3.17 174.62,3.81 v174.62,6.99
N$88  (via drill 0.25)
  Top 0.254: v108.58,5.08 v48.9,5.08
  Route2 0.254: X3.C22 43.18,7.62 45.72,5.08 v48.9,5.08 | v108.58,5.08 111.76,5.08 115.57,8.89 128.91,8.89 128.91,6.99 132.08,3.81 138.43,3.81 138.43,4.45 139.06,5.08 160.02,5.08 X4.C22
N$89  (via drill 0.25)
  Top 0.254: X3.C23 39.37,10.16 v39.37,16.51 | v100.33,21.59 130.81,21.59 131.44,22.23 v158.75,22.23
  Route2 0.254: v158.75,22.23 161.29,19.68 161.29,10.79 160.66,10.16 158.75,10.16 X4.C23
  Route15 0.254: v38.73,23.5 40.64,25.4 75.56,25.4 76.83,26.67 83.82,26.67 88.9,21.59 v100.33,21.59
  Bottom 0.254: v39.37,16.51 38.73,17.14 v38.73,23.5
N$90  (via drill 0.25)
  Top 0.254: X3.C24 36.83,10.16 29.84,10.16 29.21,10.79 29.21,19.05 v29.84,19.05
  Route15 0.254: v29.84,19.05 38.73,27.94 120.65,27.94 129.54,19.05 149.22,19.05 153.67,14.61 153.67,10.16 X4.C24
N$91  (via drill 0.25)
  Route2 0.254: X3.C25 35.56,7.62 40.64,2.54 111.76,2.54 113.03,1.27 130.81,1.27 130.81,1.91 131.44,2.54 v142.88,2.54
  Bottom 0.254: v142.88,2.54 146.05,5.71 146.05,9.53 146.69,10.16 152.4,10.16 X4.C25
N$92
  Route15 0.254: X3.C26 33.02,6.35 109.86,6.35 111.12,7.62 128.91,7.62 131.44,5.08 146.69,5.08 149.86,8.26 X4.C26
N$93
  Bottom 0.254: X3.C27 34.29,5.08 47.62,5.08 47.62,3.17 45.72,1.27 21.59,1.27 21.59,3.17 15.88,8.89 15.88,77.47 45.09,106.68 172.72,106.68 172.72,40.64 173.35,40.01 173.35,15.24 173.99,14.61 173.99,8.26 173.35,7.62 147.32,7.62 X4.C27
N$94  (via drill 0.25)
  Top 0.254: v46.35,3.81 109.22,3.81 v111.76,6.35
  Route15 0.254: v111.76,6.35 126.36,6.35 129.54,3.17 141.6,3.17 v142.24,3.81
  Bottom 0.254: X3.C28 33.02,3.81 v46.35,3.81 | v142.24,3.81 144.78,6.35 X4.C28
N$95  (via drill 0.25)
  Top 0.254: v29.21,2.54 109.86,2.54 114.94,7.62 v130.18,7.62
  Route2 0.254: v130.18,7.62 132.72,7.62 133.99,6.35 142.24,6.35 X4.C29
  Bottom 0.254: X3.C29 29.21,5.08 v29.21,2.54
N$96  (via drill 0.25)
  Top 0.254: v24.77,2.54 26.67,0.64 v120.65,0.64 | v125.09,5.08 137.79,5.08 v139.06,3.81
  Bottom 0.254: X3.C30 24.77,6.99 v24.77,2.54 | v125.09,5.08 v120.65,0.64 | v139.06,3.81 139.7,4.45 X4.C30
V1  (via drill 0.25)
  Top 0.508: X3.A31 20.32,20.95 v19.05,20.95 | v81.28,88.27 v75.56,88.27
  Route15 0.508: R1.2 92.08,23.5 v94.61,23.5
  Bottom 0.508: JP1.2 112.39,1.91 93.98,1.91 X3.C2 X3.B2 X3.A2 93.98,22.86 v94.61,23.5 | X3.C31 X3.B31 X3.A31 | v19.05,20.95 20.32,22.23 20.32,79.38 45.72,104.78 75.56,104.78 v75.56,88.27 | v81.28,88.27 87.63,94.61 90.17,94.61 R1.2
V2  (via drill 0.25)
  Top 0.508: R2.2 134.62,24.13 v135.25,24.13 | X4.A31 X4.B31 X4.C31 | X4.C2 X4.B2 X4.A2 | v203.2,1.27 122.56,1.27 120.02,3.81 JP1.1
  Bottom 0.508: v135.25,24.13 137.16,22.23 X4.A31 | JP1.1 121.28,3.81 124.46,6.99 128.91,6.99 129.54,6.35 137.16,6.35 X4.C31 | v203.2,1.27 X4.C2
VCC
  pour Route15: 7.62,0 0,0 0,114.3 231.14,114.3 231.14,0 217.17,0 217.17,5.08 223.52,5.08 223.52,17.78 214.63,17.78 214.63,0 133.35,0 133.35,17.78 124.46,17.78 124.46,5.08 132.08,5.08 132.08,0 106.68,0 106.68,17.78 97.79,17.78 97.79,5.08 104.14,5.08 104.14,0 8.89,0 8.89,5.08 16.51,5.08 16.51,17.78 7.62,17.78

## Text on the board
tValues: YACC1 BUS JUMPER BOARD HORIZONTAL V3.2 | onepagecomputer.com